# EAGLE board DIGISPARK_PRODUCTION_REV3 (EAGLE 6.2)
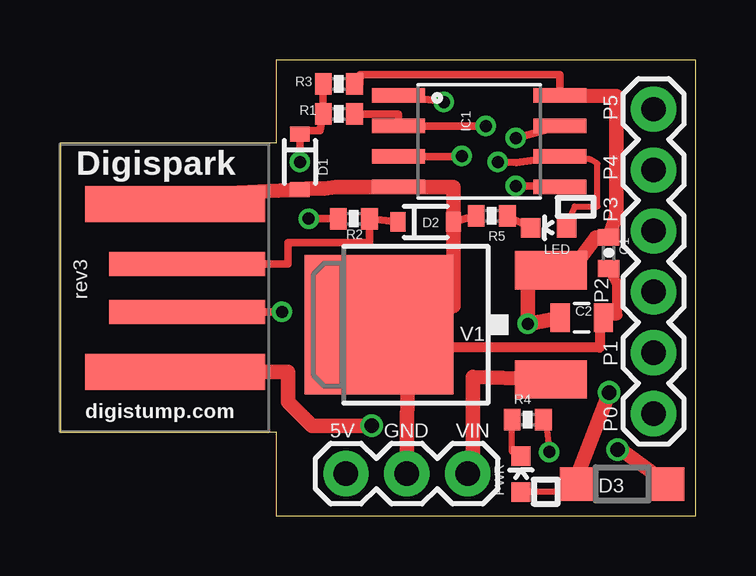
[diagram p0: board, top side]
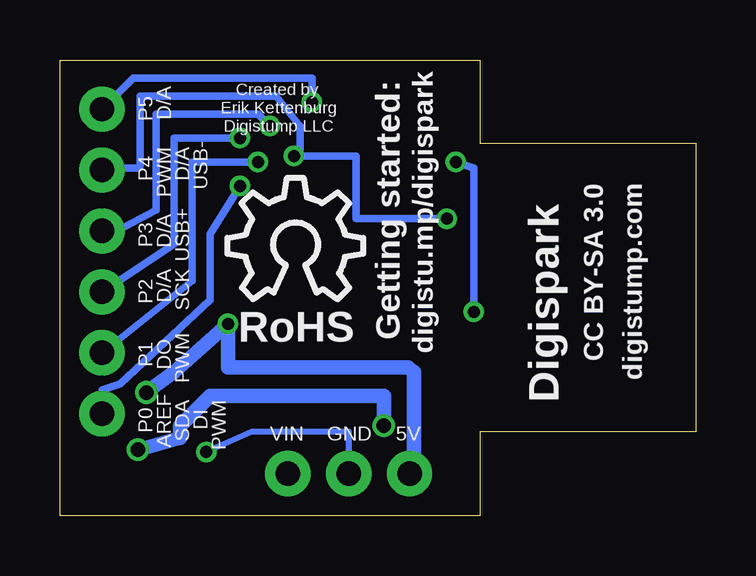
[diagram p1: board, bottom side, seen from below]

Size 26.5 x 19 mm. Coordinates in mm from the lower left corner, seen from the top.
Outline: 0,3.5 9,3.5 9,0 26.5,0 26.5,19 9,19 9,15.53 0,15.53 0,3.5
Copper layers (1*16): Top 0.0356mm / dielectric 1.5011mm / Bottom 0.0356mm
Design rules: minimum track width 8mil, minimum drill 13mil, track to track 12mil, track to pad 12mil, pad to pad 12mil, via to via 12mil, smd to smd 8mil, copper to edge 15mil, drill to drill 12mil, minimum pad ring 7mil, minimum via ring 7mil, stop-mask expansion 4mil, vias tented up to drill 25mil, thermal gap 10mil

## Footprints (pad centres in the part's own frame; a part is rotated, then mirrored left to right if it is on the bottom)
0402-CAP = smd 0.7 x 0.9: 1 -0.65,0; 2 0.65,0
0805 = smd 0.8 x 1.2: 1 -0.9,0; 2 0.9,0
SOD-323 = smd 0.63 x 0.83: 1 -1.15,0; 2 1.15,0
SOD123 = smd 1.4 x 1.4: A 1.9,0; C -1.9,0
SO08-EIAJ = smd 0.61 x 2.21: 1 -1.905,-3.378; 2 -0.635,-3.378; 3 0.635,-3.378; 4 1.905,-3.378; 5 1.905,3.353; 6 0.635,3.353; 7 -0.635,3.353; 8 -1.905,3.353
1X03 = drill 1.016 pad 1.88: 1 0,0; 2 2.54,0; 3 5.08,0
1X06 = drill 1.016 pad 1.88: 1 0,0; 2 2.54,0; 3 5.08,0; 4 7.62,0; 5 10.16,0; 6 12.7,0
LED-0603 = smd 0.8 x 0.8: A 0,-0.75; C 0,0.75
0402-RES = smd 0.7 x 0.9: 1 -0.65,0; 2 0.65,0
DPACK = smd 1.6 x 3: 1 -2.28,-4.8; 3 2.28,-4.8 | smd 5.8 x 6.2: 4 0,2.38
USB-A-PCB = smd 7.5 x 1.5: 5V -0.2,-3.5; GND -0.2,3.5 | smd 6.5 x 1: USB_M 0.3,-1; USB_P 0.3,1

## Placement (x,y rotation side)
C1  0.1uf  [0402-CAP]  22.88,10.95 270 top
C2  4.7uf  [0805]  21.75,8.25 0 top
D1  3.6 Zener  [SOD-323]  10,14.75 270 top
D2  3.6 Zener  [SOD-323]  15.25,12.25 0 top
D3  MBR0520LT  [SOD123]  23.43,1.32 180 top
IC1  ATTINY85  [SO08-EIAJ]  17.48,15.61 270 top
JP2  [1X03]  17,1.75 180 top
JP3  [1X06]  24.75,4.25 90 top
LED  [LED-0603]  20.37,12 90 top
LOGO2  LOGO-OSHW-10MILX0200-NT  [OSHW_10X200_NOTEXT]  19.52,9.01 0 bottom
PWR  [LED-0603]  19.22,1.73 0 top
R1  66.5R  [0402-RES]  11.63,16.75 0 top
R2  66.5R  [0402-RES]  12.25,12.38 180 top
R3  1K5  [0402-RES]  11.63,18 180 top
R4  [0402-RES]  19.5,4 180 top
R5  [0402-RES]  18,12.5 0 top
V1  MC78M05BDTRKG  [DPACK]  15.68,7.96 90 top
X1  USBPCB  [USB-A-PCB]  5,9.5 0 top

## Library data of the parts
C1 C2 D1 D2 IC1 JP2 JP3 LED PWR R1-R5 X1 = SparkFun
D3 = diode
LOGO2 = logo
V1 = v-reg

## Nets
5V: C1.1 C2.1 D3.A IC1.8 JP2.3 PWR.A R3.1 V1.3
GND: C1.2 C2.2 D1.2 D2.2 IC1.4 JP2.2 R4.1 R5.1 V1.4 X1.GND
N$1: IC1.2 JP3.4 R1.2
N$2: IC1.6 JP3.2 LED.A
N$3: IC1.5 JP3.1
N$5: IC1.7 JP3.3
N$6: IC1.3 JP3.5 R2.2
N$8: IC1.1 JP3.6
N$10: D1.1 R1.1 R3.2 X1.USB_M
N$11: D2.1 R2.1 X1.USB_P
N$12: LED.C R5.2
N$15: JP2.1 V1.1
N$16: D3.C X1.5V
N$17: PWR.C R4.2

## Tracks (layer width: path | path; a pad name or v marks a point on that pad's centre or on a via)
5V  (via drill 0.5, 0.6)
  Top 0.254: D3.A 21.43,0.93 21.37,1 PWR.A
  Top 0.305: R3.1 12.5,18 12.5,18.38 20.84,18.38 IC1.8
  Top 0.61: V1.3 19.5,9.76 v19.5,8 C2.1 | 20.25,10.75 20.23,10.73 V1.3 | IC1.8 23.19,17.5 23.19,12.54 C1.1 22.35,11.6 21.5,10.5 20.74,10.5 V1.3 | D3.A 21.57,1.68 v22.9,5.13
  Bottom 0.61: JP2.3 12,2 11.75,2 11.75,6 12,6.17 19.5,6.17 v19.5,8 21.75,6 v22.9,5.13
GND  (via drill 0.5)
  Top 0.254: R4.1 20.25,3.9 v20.4,2.65
  Top 0.305: 14.15,13.75 IC1.4 | 14.5,8.22 13.76,8.21 | 13.76,8.21 V1.4 | 13.75,8.75 13.76,8.21 | R5.1 17.25,12.6 17.25,12.5 D2.2
  Top 0.406: C2.2 22.75,8.35 23.24,8.35 23.24,9.65 C1.2 | 22.75,8.1 22.5,7.85 22.5,7 14.5,7
  Top 0.61: C2.2 22.75,8.1 | JP2.2 14.5,7 14.5,7.96 V1.4 11.85,9.4 | 13.75,8.75 16.4,8.75 D2.2 16.4,13.71 IC1.4 11.5,13.71 11,13.63 10.25,13.63 D1.2 4.8,13.35 X1.GND
  Bottom 0.254: v20.4,2.65 18.5,3.5 14.47,3.5 14.46,3.49 JP2.2
N$1  (via drill 0.5)
  Top 0.305: v17.75,16.25 14.35,16.25 14.1,16.5 IC1.2 14.11,16.75 R1.2
  Bottom 0.305: v17.75,16.25 18.25,16.75 22.5,16.75 22.5,12.75 24.13,11.87 JP3.4
N$2  (via drill 0.5)
  Top 0.254: LED.A 21.12,12.11 21.46,12.89 22.42,12.89 22.42,14.67 22.1,14.86 20.95,14.86 IC1.6
  Top 0.305: IC1.6 19.02,14.72 v18.25,14.75
  Bottom 0.305: v18.25,14.75 21,14.75 21,9.79 JP3.2
N$3  (via drill 0.5)
  Top 0.305: 21.5,13.79 IC1.5 20.79,13.75 v19,13.75
  Bottom 0.305: JP3.1 24.75,5.25 24,5.5 20.25,9 20.25,11.75 v19,13.75
N$5  (via drill 0.5)
  Top 0.305: IC1.7 v19,15.74 v19,15.75
  Bottom 0.305: v19,15.75 21.75,15.75 21.75,11.33 JP3.3
N$6  (via drill 0.5)
  Top 0.305: v16.75,15 16.48,14.97 IC1.3 | R2.2 v10.37,12.38
  Bottom 0.305: JP3.5 24.66,14.5 23.25,14.5 23.16,14.59 23.16,17.5 17.5,17.5 16.5,16.25 16.5,15.25 v16.75,15 14.15,15 14.15,12.38 v10.37,12.38
N$8  (via drill 0.5)
  Top 0.305: v16,17.25 15.98,17.27 IC1.1
  Bottom 0.305: JP3.6 23.45,18.25 16,18.25 v16,17.25
N$10  (via drill 0.5)
  Top 0.305: X1.USB_M v9.25,8.5 | v10,14.75 D1.1 9.85,16.05 10.85,16.05 R1.1 R3.2
  Bottom 0.305: v9.25,8.5 9.25,14.5 v10,14.75
N$11
  Top 0.305: X1.USB_P 9.5,10.5 9.5,11.38 12.9,11.38 R2.1 D2.1
N$12
  Top 0.305: LED.C R5.2
N$15
  Top 0.61: V1.1 17.23,5.77 17.23,1.98 JP2.1
N$16  (via drill 0.6)
  Top 0.61: X1.5V 9.5,6 9.5,4.75 10.5,3.75 v13,3.75 | v23.25,2.75 23.25,2.85 D3.C
  Bottom 0.61: v13,3.75 13,5 20.25,5 21.5,3.75 21.5,3.25 v23.25,2.75
N$17
  Top 0.254: PWR.C 18.85,2.65 R4.2

## Text on the board
tPlace: rev3
bPlace: digistu.mp/digispark | Getting started: | Created by | D/A | Erik Kettenburg | Digistump LLC | USB- | D/A | PWM | USB+ | D/A | SCK | D/A | RoHS | PWM | DO | PWM | SDA | AREF | DI
tNames: P5 | Digispark | P4 | P3 | P2 | P1 | digistump.com | P0 | 5V | GND | VIN
bNames: P5 | P4 | digistump.com | CC BY-SA 3.0 | P3 | P2 | P1 | Digispark | P0 | 5V | GND | VIN
Reference: The Digispark design (schematic, layout, concept) is licensed under the Creative Commons Attribution-ShareAlike 3.0 Unported License: http://creativecommons.org/licenses/by-sa/3.0/ | The Digispark and Digistump names and logos (or derivatives thereof) may not be used as part of the name of a product, company, or domain name without express written permission. | Digispark name. logo and Digistump name, logo Copyright 2013 Digistump LLC All Rights Reserved | For full details and license information please see http://digistump.com/wiki/digispark/policy | Created by Erik Kettenbugr, Digistump LLC - digistump.com 2012